# Altium PCB PCB1.PcbDoc
Units mm, origin at the board's own origin, x right, y up, seen from the top; angles counter-clockwise.
Board outline 104.33 x 88.77 mm, 4 copper layers (Top Layer, GND, Signal #1, Signal #2), stack 1.582 mm thick; 59 components, 38 nets, 255 pads, 88 vias.
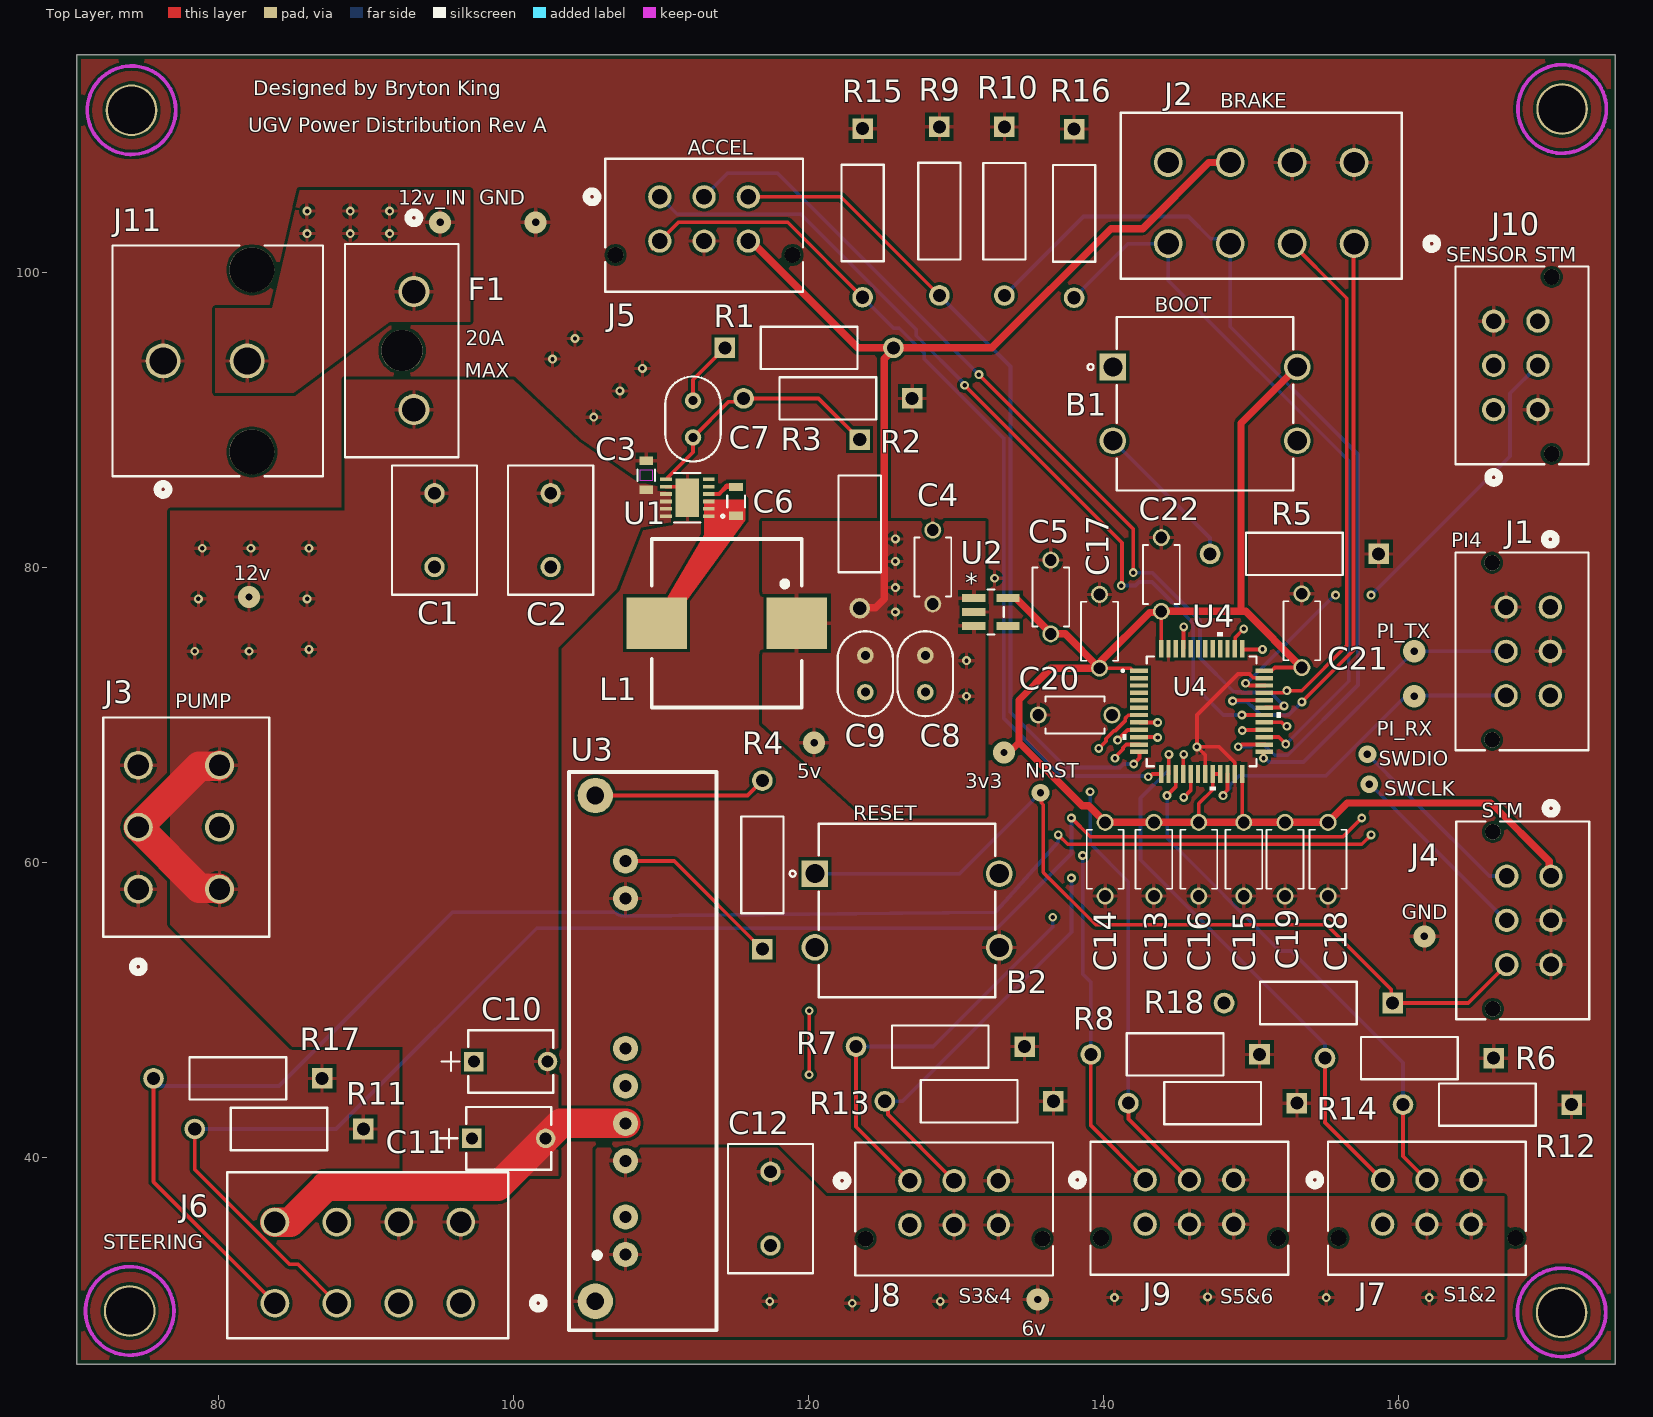
[diagram p0: Top Layer view]
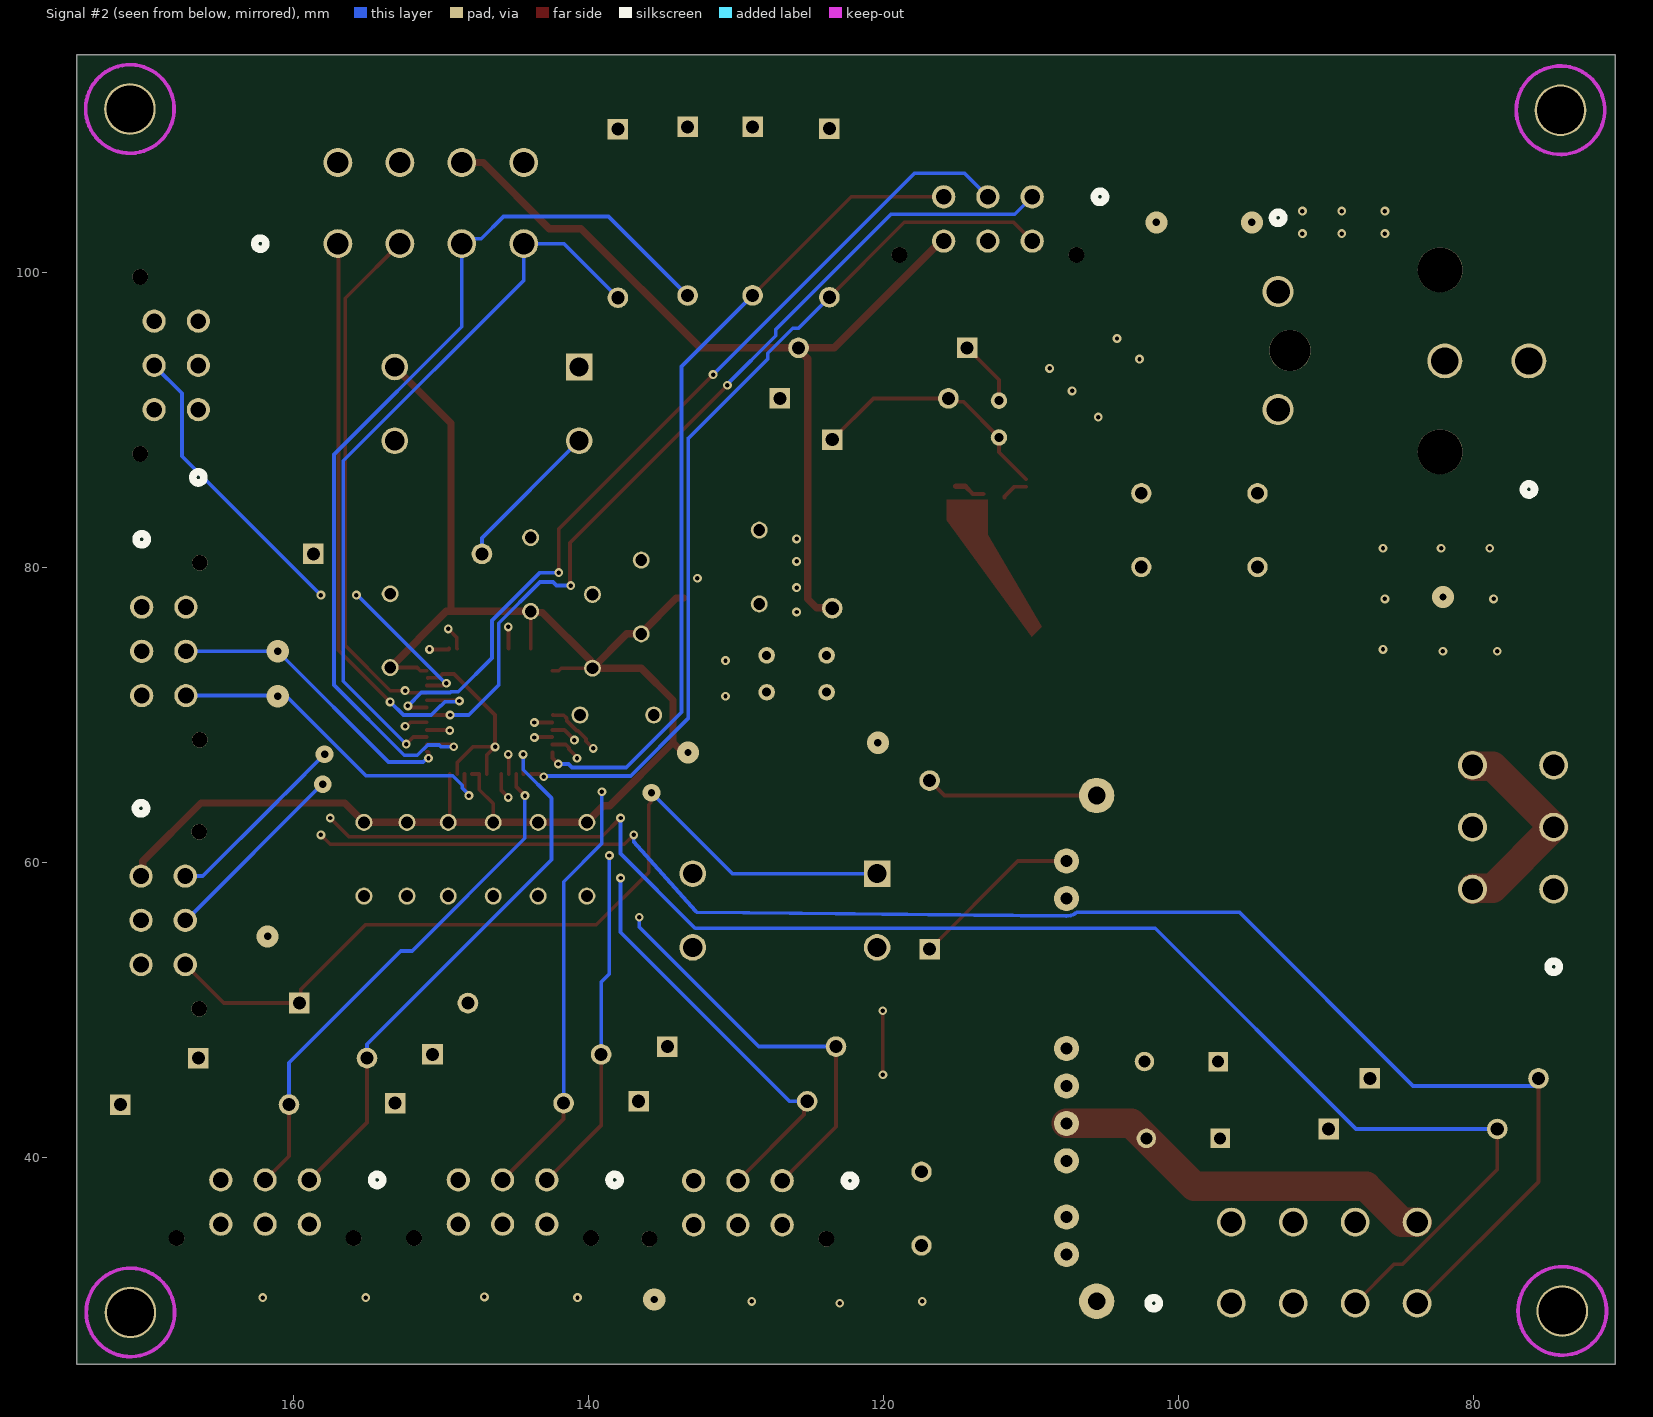
[diagram p1: Signal #2 view, seen from below]
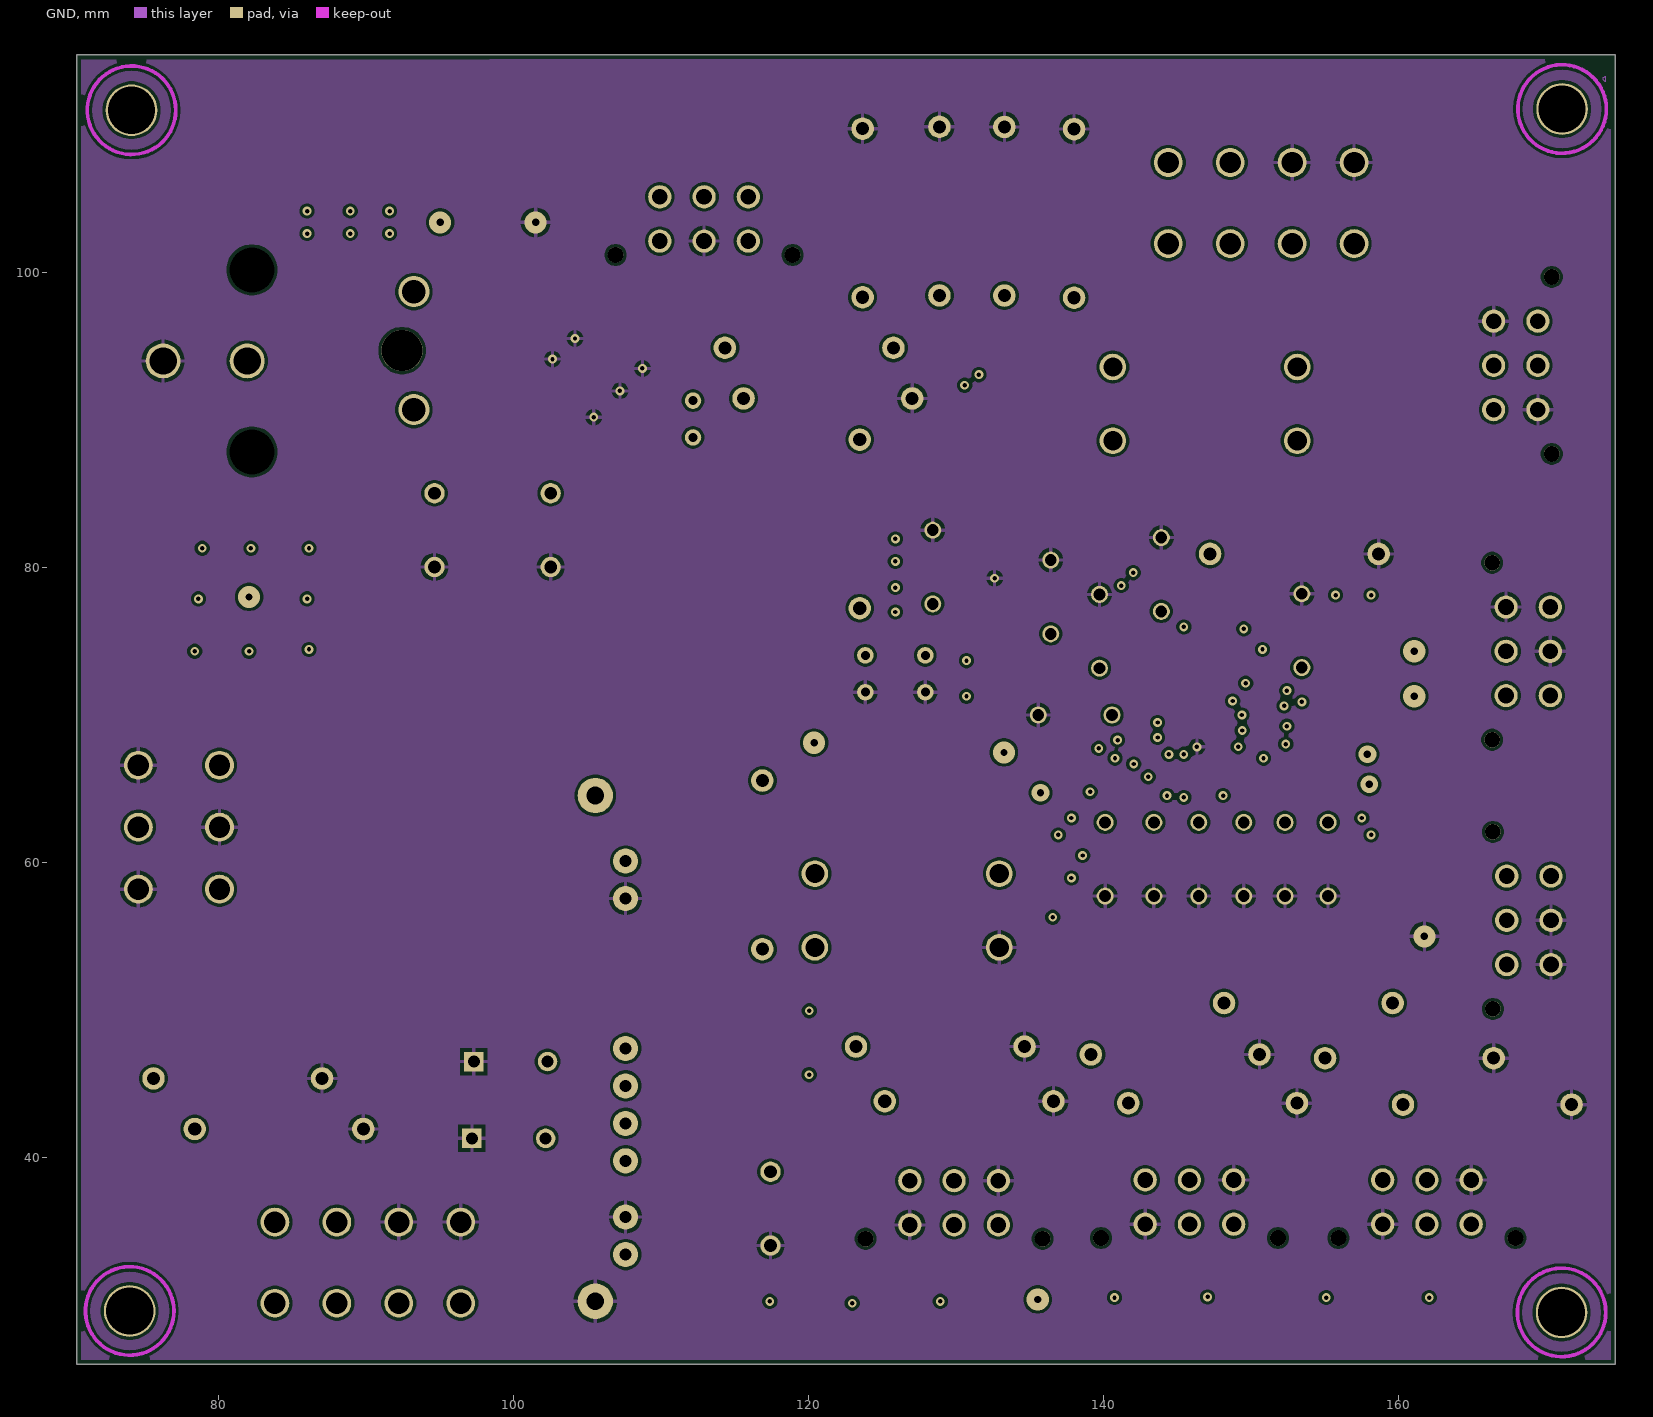
[diagram p2: GND]
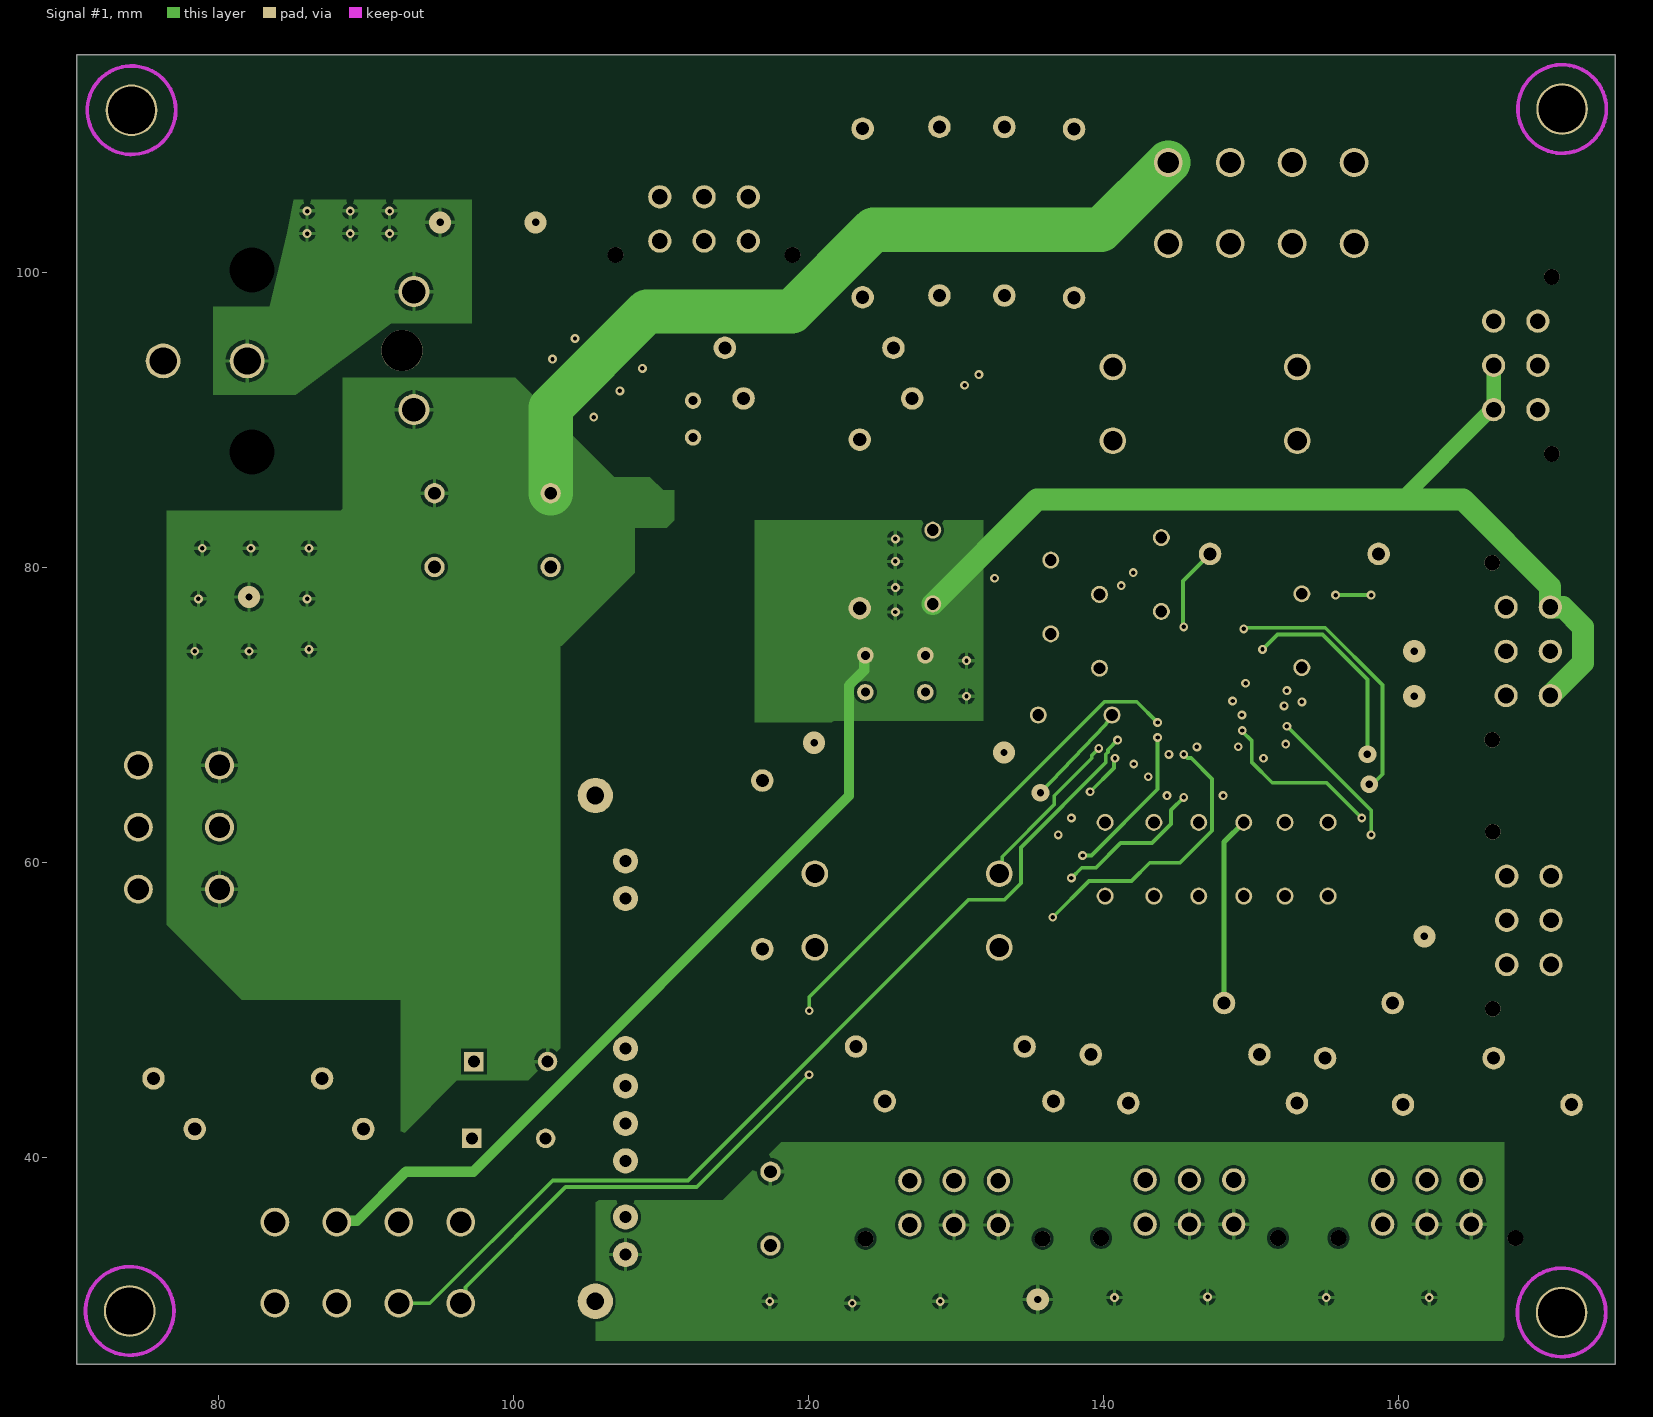
[diagram p3: Signal #1]
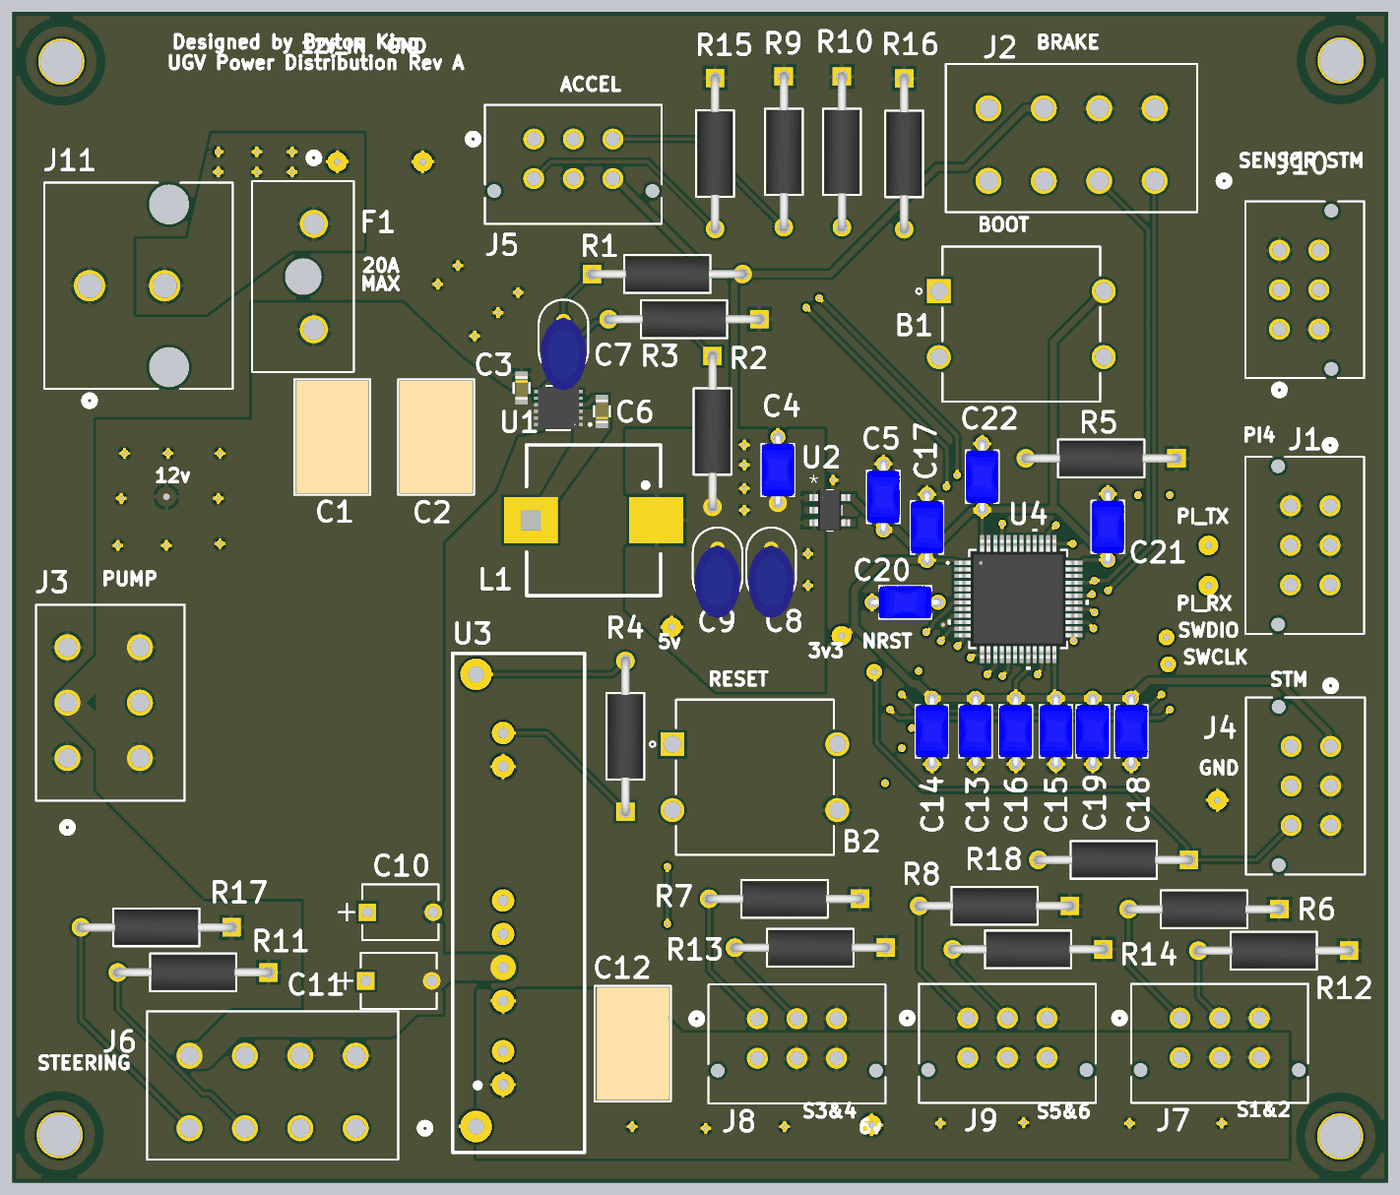
[diagram p4: 3D render of the assembled board from above, using the file's embedded part models]

## Layer stack, top to bottom
Top Solder: solder mask 0.0102, Solder Resist, Dk 3.5
Top Layer: signal copper 0.07
Dielectric 2: prepreg 0.1778, PP-006, Dk 4.1
GND: signal copper 0.035
Dielectric 1: dielectric 1.016, FR-4, Dk 4.8
Signal #1: signal copper 0.035
Dielectric 3: prepreg 0.1778, PP-006, Dk 4.1
Signal #2: signal copper 0.07
Bottom Solder: solder mask 0.0102, Solder Resist, Dk 3.5

## Board outline
70.35,25.975 70.35,114.75 174.675,114.75 174.675,25.975

## Design rules (kind name [scope] priority, off if disabled: settings)
BoardOutlineClearance [All] p1: gap=0.3 ignorepadtopadclearanceinfootprint=FALSE
Clearance [All] p1: gap=0.2 ignorepadtopadclearanceinfootprint=TRUE
HoleSize [All] p1: absolutevalues=TRUE maxlimit=4 minlimit=0.025 maxpercent=80.000 minpercent=20.000
MinimumAnnularRing [All] p1: minimumring=0.15
MinimumSolderMaskSliver [All] p1: minsoldermaskwidth=0.19
PolygonConnect PolygonConnect_5v [InNet('5v')] p1: thpad.connectstyle=Direct thpad.reliefconductorwidth=0.254 thpad.reliefentries=4 thpad.polygonreliefangle="90 Angle" thpad.airgapwidth=0.254 smdpad.connectstyle=Relief smdpad.reliefconductorwidth=0.254 smdpad.reliefentries=4 smdpad.polygonreliefangle="90 Angle" smdpad.airgapwidth=0.254 via.connectstyle=Relief via.reliefconductorwidth=0.254 via.reliefentries=4 via.polygonreliefangle="90 Angle" via.airgapwidth=0.254
PolygonConnect PolygonConnect_12V [HasFootprint('LMR51450FSQDRRRQ1') vs InNet('12v')] p2: thpad.connectstyle=Relief thpad.reliefconductorwidth=0.254 thpad.reliefentries=4 thpad.polygonreliefangle="90 Angle" thpad.airgapwidth=0.254 smdpad.connectstyle=Direct smdpad.reliefconductorwidth=0.254 smdpad.reliefentries=4 smdpad.polygonreliefangle="90 Angle" smdpad.airgapwidth=0.254 via.connectstyle=Relief via.reliefconductorwidth=0.254 via.reliefentries=4 via.polygonreliefangle="90 Angle" via.airgapwidth=0.254
PolygonConnect PolygonConnect_12V_c3 [HasFootprint('.1U') vs InNet('12v')] p3: thpad.connectstyle=Relief thpad.reliefconductorwidth=0.254 thpad.reliefentries=4 thpad.polygonreliefangle="90 Angle" thpad.airgapwidth=0.254 smdpad.connectstyle=Direct smdpad.reliefconductorwidth=0.254 smdpad.reliefentries=4 smdpad.polygonreliefangle="90 Angle" smdpad.airgapwidth=0.254 via.connectstyle=Relief via.reliefconductorwidth=0.254 via.reliefentries=4 via.polygonreliefangle="90 Angle" via.airgapwidth=0.254
PolygonConnect [All] p4: connectstyle=Relief reliefconductorwidth=0.254 reliefentries=4 polygonreliefangle="90 Angle" airgapwidth=0.254
RoutingVias [All] p1: holewidth=0.5 width=0.6 viastyle="Through Hole" minholewidth=0.25 minwidth=0.5 maxholewidth=0.3 maxwidth=1
SolderMaskExpansion [All] p1: expansion=0.102 istentingtop=FALSE
SupplyNets "Schematic Supply Nets" [InNet('GND')] p1: voltage=0.000
Width [All] p1: maxlimit=10 minlimit=0.254 preferedwidth=0.254 minimp=50.000000 maximp=50.000000 favimp=50.000000
28 further rules are at their usual default settings.

## Classes and differential pairs
component class PowerRegulation: C1 C2 C3 C4 C5 C6 C7 C8 C9 C10 C11 C12 L1 R1 R2 R3 R4 U1 U2 U3
component class MCU: B1 B2 C13 C14 C15 C16 C17 C18 C19 C20 C21 C22 R5 R6 R7 R8 R9 R10 R11 R12 R13 R14 R15 R16 R17 R18 U4
component class Connectors: F1 J1 J2 J3 J4 J5 J6 J7 J8 J9 J10 J11

## Components (designator, comment, footprint, x,y, rotation, side; value= is the part's Value field where it differs from the comment)
B1 "Button" Button 146.7,90.65 r0 top
B2 "Button" Button 126.5,56.3 r0 top
C1 "Capacitor" 4.7u 94.742,82.55 r90 top value=4.7u
C2 "Capacitor" 4.7u 102.616,82.55 r90 top value=4.7u
C3 "Capacitor" .1U#1 108.966,86.233 r270 top value=100n
C4 "Capacitor" 1U 128.27,80.264 r270 top value=1u
C5 "Capacitor" 1U 136.271,78.232 r270 top value=1u
C6 "Capacitor" .1U#2 115.062,84.455 r90 top value=100n
C7 "Capacitor" Cap33u 111.76,90.043 r270 top value=33p
C8 "Capacitor" Cap33u 127.508,72.771 r270 top value=33u
C9 "Capacitor" Cap33u 123.444,72.771 r270 top value=33u
C10 "Capacitor" 22u 99.568,46.228 r0 top value=22u
C11 "Capacitor" 22u 99.441,41.021 r0 top value=22u
C12 "Capacitor" 4.7u 117.523,36.551 r90 top value=220u
C13 "Capacitor" 1U 143.256,60.452 r270 top value=1u
C14 "Capacitor" 1U 139.954,60.452 r270 top value=.1u
C15 "Capacitor" 1U 149.352,60.452 r270 top value=1u
C16 "Capacitor" 1U 146.304,60.452 r270 top value=10n
C17 "Capacitor" 1U 139.827,75.398 r90 top value=.1u
C18 "Capacitor" 1U 155.067,60.452 r270 top value=10u
C19 "Capacitor" 1U 152.146,60.452 r270 top value=.1u
C20 "Capacitor" 1U 138.303,70.104 r180 top value=100n
C21 "Capacitor" 1U 153.543,75.438 r90 top value=.1u
C22 "Capacitor" 1U 144.018,79.248 r90 top value=.1u
F1 "FUSE_178.6764.0001_LTF" fuse_holder 92.329,94.742 r270 top
J1 "6_pin_header" 6pinHeader1 168.735,74.12 r90 top
J2 "8_pin_header" 8pinHeader 149.975,104.6 r180 top
J3 "6_pin_header" 6pinHeader2 77.343,62.611 r90 top
J4 "6_pin_header" 6pinHeader1 168.783,55.88 r90 top
J5 "6_pin_header" 6pinHeader1 113.067,103.582 r180 top
J6 "8_pin_header" 8pinHeader 89.408,32.766 r180 top
J7 "6_pin_header" 6pinHeader1 162.069,36.932 r180 top
J8 "6_pin_header" 6pinHeader1 130.017,36.884 r180 top
J9 "6_pin_header" 6pinHeader1 145.971,36.932 r180 top
J10 "6_pin_header" 6pinHeader1 167.942,93.853 r270 top
J11 "2POS HEADER" "CONN HEADER VERT 2POS" 78.755,94.234 r270 top
L1 "Inductor" 4.7uIND 114.427,76.2 r270 top value=4.7u
R1 "Resistor" resistor 120.396,94.869 r0 top value=1k
R2 "Resistor" resistor 123.444,82.55 r270 top value=100k
R3 "Resistor" resistor 120.904,91.44 r180 top value=19.1k
R4 "Resistor" resistor 116.84,60.198 r90 top value=220
R5 "Resistor" resistor 152.527,80.899 r180 top value=10K
R6 "Resistor" resistor 160.322,46.711 r180 top value=10K
R7 "Resistor" resistor 128.524,47.498 r180 top value=10K
R8 "Resistor" resistor 144.447,46.965 r180 top value=10K
R9 "Resistor" resistor 128.846,103.757 r270 top value=10K
R10 "Resistor" resistor 133.25,103.75 r270 top value=10K
R11 "Resistor" resistor 83.693,41.91 r180 top value=10K
R12 "Resistor" resistor 165.608,43.561 r180 top value=10K
R13 "Resistor" resistor 130.477,43.79 r180 top value=10K
R14 "Resistor" resistor 146.987,43.663 r180 top value=10K
R15 "Resistor" resistor 123.639,103.63 r270 top value=10K
R16 "Resistor" resistor 137.975,103.6 r270 top value=10K
R17 "Resistor" resistor 80.899,45.339 r180 top value=10K
R18 "Resistor" resistor 153.475,50.45 r180 top value=10K
U1 "LMR51450FSQDRRRQ1" LMR51450FSQDRRRQ1 111.76,84.836 r180 top
U2 "TLV70033DDCR" TLV70033DDCR 131.953,76.962 r0 top
U3 "NSR020A0X43Z" NSR020A0X43Z 105.519,65.991 r270 top
U4 "STM32G474CBT6TR" STM32G474CBT6TR 146.626,70.354 r0 top

## Footprints (in the part's own frame and the unit in brackets; to place one, negate y for a bottom-side part, rotate by r counter-clockwise, add the part's x,y. Pads: shape width x height; smd on the part's side, far side on the other; paste and mask are expansions set on the pad)
1U [mm]
  round 1.15 hole 0.8: 1(-2.246,0.127) 2(2.754,0.127)
  silkscreen extent -1.75,-1.12 2.25,1.38, body extent -2.5,-1.12 3,1.38, height 5.5
4.7u [mil]
  round 54 hole 34 paste-99999 mask+0: 1(-100,5) 2(96.85,5)
  silkscreen extent -174,-109 171,119, body extent -169,-104 166,114, height 433
4.7uIND [mm]
  rect 3.5x4.1 smd paste-2539.97 mask+0: 1(0,4.75) 2(0,-4.75)
  silkscreen extent -5.72,-5.08 5.72,5.08
6pinHeader1 [mil]
  round 62 hole 42 paste-99999 mask+0: 1(125,-60) 2(6.89,-60) 3(-111.22,-60) 4(125,58.11) 5(6.89,58.11) 6(-111.22,58.11)
  round 42 hole 42 unplated paste-99999 mask+0: 7(-229.33,95.12) 8(243.11,95.12)
  silkscreen extent -257,-162 321,193
6pinHeader2 [mil]
  round 77 hole 57 paste-99999 mask+0: 1(-174.79,110.48) 2(-9.44,110.48) 3(155.92,110.48) 4(-174.79,-106.06) 5(-9.44,-106.06) 6(155.92,-106.06)
  silkscreen extent -397,-239 283,204
8pinHeader [mil]
  round 77 / inner round 77.01 / far side round 77 hole 57 paste-99999 mask+0: 1(-275,105) 2(-109.65,105) 3(55.71,105) 4(221.06,105) 5(-275,-111.54) 6(-109.65,-111.54) 7(55.71,-111.54) 8(221.06,-111.54)
  silkscreen extent -497,-244 348,199
22u [mil]
  rect 52x52 hole 32 paste-99999 mask+0: 1(-90,10)
  round 52 hole 32 paste-99999 mask+0: 2(106.85,10)
  silkscreen extent -176,-74 122,94
.1U#1 [mil]
  rect 22x37 smd paste+0 mask+0: 1(-38.5,0) 2(38.5,0)
  Top Layer keep-out region: -15,-16.5 -15,16.5 15,16.5 15,-16.5
  silkscreen extent -15,-24 15,24, body extent -36,-19 36,19, height 37
.1U#2 [mil]
  rect 22x37 smd paste+0 mask+0: 1(-38.5,0) 2(38.5,0)
  silkscreen extent -15,-24 15,24, body extent -36,-19 36,19, height 37
Button [mil]
  rect 71x71 / inner round 70.98 / far side rect 71x71 hole 51 paste-99999 mask+0: 1(-240,115)
  round 71 / inner round 70.98 / far side round 71 hole 51 paste-99999 mask+0: 2(252.13,115) 3(-240,-81.85) 4(252.13,-81.85)
  silkscreen extent -307,-215 242,248
Cap33u [mil]
  round 44 hole 24 paste-99999 mask+0: 1(-49.21,15) 2(49.21,15)
  silkscreen extent -113,-59 114,89, body extent -59,-54 158,84, height 236
"CONN HEADER VERT 2POS" [mil]
  round 93 / inner round 92.99 / far side round 93 hole 73 paste-99999 mask+0: 1(10,-100) 2(10,124.41)
  round 120 / inner round 60 / far side round 120 hole 120 unplated paste-99999 mask+0: 3(-232.91,137.2) 4(252.91,137.2)
  silkscreen extent -298,-235 368,327
fuse_holder [mil]
  round 83 hole 63 paste-99999 mask+0: 1(-155,35) 2(159.96,35)
  round 110 hole 110 unplated paste-99999 mask+0: 3(2.48,3.5)
  silkscreen extent -367,-149 287,154
LMR51450FSQDRRRQ1 [mil]
  rect 31.81x10.03 smd paste+0 mask+0: 1(-56.91,54.22) 2(-56.91,34.53) 3(-56.91,14.84) 4(-56.91,-4.84) 5(-56.91,-24.53) 6(-56.91,-44.22) 7(56.91,-44.22) 8(56.91,-24.53) 9(56.91,-4.84) 10(56.91,14.84) 11(56.91,34.53) 12(56.91,54.22)
  rect 63x102 smd paste+0 mask+0: 13(0,5)
  silkscreen extent -99,-61 35,71, body extent -61,-56 61,66, height 32
NSR020A0X43Z [mm]
  round 1.7 hole 0.8: 1(32.59,2.05) 2(5.92,2.05) 3(8.46,2.05) 4(18.62,2.05) 5(21.16,2.05) 6(23.7,2.05) 7(26.24,2.05) 8(30.05,2.05)
  round 2.4 hole 1.2: 9(1.47,0) 10(35.76,0)
  silkscreen extent -0.13,-1.78 37.72,8.22
resistor [mil]
  rect 55x55 / inner round 60 / far side rect 55x55 hole 35 paste-99999 mask+0: 1(-240,0)
  round 55 / inner round 60 / far side round 55 hole 35 paste-99999 mask+0: 2(210,0)
  silkscreen extent -144,-56 114,56, body extent -252,-51 222,51, height 103
STM32G474CBT6TR [mil]
  rect 47x12 smd paste+0 mask+0: 1(-167.32,103.27) 2(-167.32,83.58) 3(-167.32,63.9) 4(-167.32,44.21) 5(-167.32,24.53) 6(-167.32,4.84) 7(-167.32,-14.84) 8(-167.32,-34.53) 9(-167.32,-54.21) 10(-167.32,-73.9) 11(-167.32,-93.58) 12(-167.32,-113.27) 25(167.32,-113.27) 26(167.32,-93.58) 27(167.32,-73.9) 28(167.32,-54.21) 29(167.32,-34.53) 30(167.32,-14.84) 31(167.32,4.84) 32(167.32,24.53) 33(167.32,44.21) 34(167.32,63.9) 35(167.32,83.58) 36(167.32,103.27)
  rect 12x47 smd paste+0 mask+0: 13(-108.27,-172.32) 14(-88.58,-172.32) 15(-68.9,-172.32) 16(-49.21,-172.32) 17(-29.53,-172.32) 18(-9.84,-172.32) 19(9.84,-172.32) 20(29.53,-172.32) 21(49.21,-172.32) 22(68.9,-172.32) 23(88.58,-172.32) 24(108.27,-172.32) 37(108.27,162.32) 38(88.58,162.32) 39(68.9,162.32) 40(49.21,162.32) 41(29.53,162.32) 42(9.84,162.32) 43(-9.84,162.32) 44(-29.53,162.32) 45(-49.21,162.32) 46(-68.9,162.32) 47(-88.58,162.32) 48(-108.27,162.32)
  silkscreen extent -214,-216 211,206, body extent -177,-182 177,172, height 63
TLV70033DDCR [mil]
  rect 62x22 smd paste-31 mask-31: 1(-31,37.4) 2(-31,0) 3(-31,-37.4) 4(61,-37.4) 5(61,37.4)
  silkscreen extent 6,-60 50,60, body extent -45,-60 75,60, height 43

## Part data
C13: "U4 VREF decoupling 2", SimulationGenericComponent=True
C14: "U4 VREF decoupling 1", SimulationGenericComponent=True
C15: "U4 VDDA decoupling 2", SimulationGenericComponent=True
C16: "U4 VDDA decoupling 1", SimulationGenericComponent=True
C17: "U4 VBAT decoupling", SimulationGenericComponent=True
C18: "Local 3.3 V bulk capacitor", SimulationGenericComponent=True
C19: "U4 VDD pin 24 decoupling", SimulationGenericComponent=True
C21: "U4 VDD pin 36 decoupling", SimulationGenericComponent=True
C22: "U4 VDD pin 48 decoupling", SimulationGenericComponent=True
J1: "Pi"
J2: "Brake Motor"
J3: "Solenoid/Pump/Modem"
J4: "Onboard Stm"
J5: "Accel Motor"
J6: "Steering Motor"
J7: "Servo1&2"
J8: "Servo3&4"
J9: "Servo5&6"
J10: "OffboardSTM & SolenoidGPIO"
J11: library part "CONN HEADER VERT 2POS", "12V INPUT"
C1 C2 C3 C4 C5 C6 C7 C8 C9 C10 C11 C12 C20 L1: SimulationGenericComponent=True
R1 R2 R3 R4 R5 R6 R7 R8 R9 R10 R11 R12 R13 R14 R15 R16 R17 R18: SimulationGenericComponent=True, TC1=0, TC2=0

## Free pads (board coordinates)
  round 3.5 hole 3.2 unplated paste-2539.97: 3(73.95,29.575) 3(74.077,110.977) 3(171.025,29.475) 3(171.061,111.062)

## Via types
v1: diameter 0.6, hole 0.3, Top Layer to Signal #2, 75 vias
v2: diameter 1.5, hole 0.5, Top Layer to Signal #2, 8 vias
v3: diameter 1.2, hole 0.5, Top Layer to Signal #2, 3 vias
v4: diameter 0.6, hole 0.3, Top Layer to Signal #2, tented top, 1 vias
v5: diameter 1.5, hole 0.5, Top Layer to Signal #2, tented top, 1 vias

## Nets (pads, with @x,y where several pads share a name; then routed paths per layer and width w, separated by ;. In a path a pad name is that pad's centre, name@x,y a point inside that pad or via, vN(x,y) a via of type N, cw(c..) or ccw(c..) an arc to the next point about the centre after c; other vN are vias at no path point)
3v3: B1.2 C5.2 C13.1 C14.1 C15.1 C16.1 C17.1 C18.1 C19.1 C21.1 C22.1 J4.1 R18.2 U2.5 U4.1 U4.20 U4.21 U4.24 U4.36 U4.48 | length 122.9
  Top Layer w0.254: C17.1 141.82,73.152 141.991,72.981 U4.1@142.435,72.981 ; U4.48@143.881,74.482 C22.1@143.881,76.708 ; C16.1 146.431,63.968 147.376,64.913 U4.20 ; U4.20@147.435,65.981 U4.21@147.876,65.981 ; U4.24 149.376,62.801 C15.1 ; U4.36@150.935,72.981 151.379,72.981 151.59,73.192 C21.1
  Top Layer w0.5: v2(133.223,67.437) 133.56,67.437 134.239,68.116 ; U2.5 134.01,77.912 136.398,75.524 C5.2 137.374,75.478 C17.1 ; C22.1 143.815,76.926 143.093,76.926 139.824,73.657 139.824,73.276 C17.1 ; C22.1@144.191,77.002 149.294,77.002 ; B1.2 149.294,89.761 149.294,77.002 ; C21.1 149.606,77.002 149.294,77.002 ; J4.1 170.179,59.183 170.179,60.072 166.243,64.008 156.504,64.008 C18.1 C19.1 C15.1 C16.1 C13.1 C14.1 138.964,63.815 138.539,63.815 134.239,68.116 ; 134.239,68.116 134.239,70.993 136.398,73.152 C17.1
  Signal #1 w0.35: R18.2 148.141,61.36 C15.1
5v: C4.2 C8.1 C9.1 J1.1 J1.3 J2.7 J5.6 J6.7 J10.1 J10.2 L1.1 R1.2 R2.2 U2.1 U2.3 | length 185.8
  Top Layer w0.254: J1.1 J1.1@170.259,77.648
  Top Layer w0.5: J5.6@115.984,102.198 123.313,94.869 R1.2 ; R2.2 123.488,77.26 124.509,77.26 125.095,77.846 125.095,94.128 125.73,94.763 R1.2 ; J2.7 147.108,107.433 142.626,102.951 140.48,102.951 132.398,94.869 R1.2
  Signal #1 w0.7: J6.7 88.092,35.698 89.362,35.698 92.68,39.015 97.233,39.015 122.716,64.498 122.716,71.98 123.745,73.009 123.745,73.941 C9.1
  Signal #1 w1: 160.147,84.582 165.956,90.391 165.975,90.391 J10.1@166.418,90.834 ; J10.1 J10.1@166.418,90.834 ; J10.2 J10.1@166.418,90.834
  Signal #1 w1.5: C4.2 135.469,84.582 160.147,84.582 164.338,84.582 170.245,78.675 170.245,77.309 J1.1 170.273,77.281 171.131,77.281 172.466,75.946 172.466,73.502 J1.3
  other v1: 130.683,71.247 130.683,73.66 125.857,76.962 125.857,78.613 125.857,80.391 125.857,81.915
  other v2: 120.35,68.1
6v: C12.2 J7.5 J7.6 J8.5 J8.6 J9.5 J9.6 U3.1 U3.7
  other v1: 122.936,30.099 117.348,30.226 128.905,30.226 140.716,30.48 155.067,30.48 162.052,30.48 147.025,30.525
  other v2: 135.509,30.353
12v: C1.2 C2.2 C3.2 C10.2 C11.2 F1.2 J2.8 J3.2 J3.4 J3.6 J6.8 U1.9 U1.10 U1.11 U1.12 U3.6 | length 95.6
  Top Layer w2: J3.4 79.978,58.23 78.678,58.23 J3.2 78.678,66.512 79.978,66.512 J3.6 ; J6.8 84.837,35.599 87.256,38.019 98.899,38.019 103.171,42.291 U3.6
  Signal #1 w3: C2.2 102.489,90.805 109.015,97.331 118.831,97.331 124.37,102.87 139.797,102.87 J2.8
  other v1: 78.359,74.295 82.042,74.295 86.106,74.422 78.613,77.851 85.979,77.851 78.867,81.28 82.169,81.28 86.106,81.28
  other v5: 82.042,77.978
ACC_EN1: J5.3 R9.2 U4.12 | length 57.1
  Top Layer w0.254: J5.3 122.163,105.106 R9.2@128.936,98.333 ; v1(142.017,66.656) 142.017,66.673 142.41,67.065 U4.12@142.41,67.456
  Signal #2 w0.254: R9.2 133.669,93.6 133.669,70.166 137.412,66.423 141.09,66.423 141.323,66.656 v1(142.017,66.656)
ACC_EN2: J5.4 R15.2 U4.13 | length 62.7
  Top Layer w0.254: J5.4@109.374,101.588 J5.4 111.164,103.378 118.559,103.378 R15.2@123.958,97.98 ; v1(143.002,65.786) 143.096,65.786 143.291,65.981 U4.13@143.876,65.981
  Signal #2 w0.254: R15.2 125.735,96.2 126.125,96.2 127.817,94.508 127.817,94.118 133.141,88.794 133.215,88.72 133.215,69.731 137.112,65.834 142.954,65.834 v1(143.002,65.786)
ACC_PWM1: J5.1 U4.30 | length 60.3
  Top Layer w0.254: v1(130.556,92.329) 141.224,81.661 141.224,78.799 v1(141.175,78.75) ; v1(149.35,69.975) 149.351,69.976 150.93,69.976 U4.30@150.933,69.979
  Signal #2 w0.254: J5.1 111.073,103.925 119.46,103.925 127.277,96.108 127.277,95.69 130.556,92.411 v1(130.556,92.329) ; v1(141.175,78.75) 142.139,78.75 142.383,78.994 143.254,78.994 146.05,76.198 146.05,72.009 148.084,69.975 v1(149.35,69.975)
ACC_PWM2: J5.2 U4.31 | length 59.5
  Top Layer w0.254: v1(131.525,93.05) 141.986,82.589 v1(141.986,79.629) ; U4.31@150.935,70.481 152.005,70.481 152.12,70.596 v1(152.214,70.596)
  Signal #2 w0.254: J5.2 114.486,106.7 117.875,106.7 v1(131.525,93.05) ; v1(141.986,79.629) 143.261,79.629 146.504,76.386 146.504,73.848 148.8,71.552 149.295,71.552 149.346,71.501 151.309,71.501 v1(152.214,70.596)
BRA_EN1: J2.3 R10.2 U4.26 | length 64.1
  Top Layer w0.254: v1(149.1,67.825) 149.194,67.825 149.346,67.977 150.931,67.977 U4.26@150.935,67.981
  Signal #2 w0.254: R10.2 138.609,103.775 145.725,103.775 147.241,102.259 148.234,102.259 J2.3 148.56,96.296 157.226,87.63 157.226,72.014 152.457,67.245 151.573,67.245 150.869,67.95 150.094,67.95 149.969,67.825 v1(149.1,67.825)
BRA_EN2: J2.4 R16.2 U4.27 | length 50.3
  Top Layer w0.254: U4.27@150.935,68.481 151.854,68.481 152.325,68.01 v1(152.325,68)
  Signal #2 w0.254: R16.2 141.642,101.933 J2.4 144.36,99.44 156.591,87.209 156.591,72.266 v1(152.325,68)
BRA_PWM1: J2.1 U4.32 | length 40.2
  Top Layer w0.254: v1(148.725,70.925) 148.781,70.981 U4.32@150.935,70.981 ; v1@153.416,70.993 153.43,70.979 153.529,70.979 156.918,74.368 J2.1@156.918,101.975
  Signal #2 w0.254: v1(148.725,70.925) 148.776,70.874 149.7,70.874 149.97,70.604 149.995,70.604 150.63,69.969 152.519,69.969 v1(153.416,70.866)
BRA_PWM2: J2.2 U4.33 | length 36.3
  Top Layer w0.254: U4.33@150.935,71.481 152.159,71.481 152.306,71.628 153.409,71.628 156.464,74.683 156.464,98.229 J2.2@152.316,102.377
  other v1: 152.4,71.628
BUCK_FB: C7.2 R2.1 R3.2 U1.7 | length 17.1
  Top Layer w0.254: U1.7 112.141,87.786 C7.2 114.569,91.221 115.351,91.221 R3.2 120.65,91.44 R2.1
GND: B2.4 C1.1 C2.1 C3.1 C4.1 C5.1 C8.2 C9.2 C10.1 C11.1 C12.1 C13.2 C14.2 C15.2 C16.2 C17.2 C18.2 C19.2 C20.2 C21.2 C22.2 J1.2 J1.4 J2.5 J2.6 J3.1 J3.3 J3.5 J4.2 J4.3 J5.5 J6.5 J6.6 J7.3 J7.4 J8.3 J8.4 J9.3 J9.4 J10.3 J10.4 J11.1 R3.1 R5.1 R6.1 R7.1 R8.1 R9.1 R10.1 R11.1 R12.1 R13.1 R14.1 R15.1 R16.1 R17.1 U1.8 U1.13 U2.2 U3.3 U3.8 U3.10 U4.19 U4.23 U4.35 U4.47 | length 15.7
  Top Layer w0.254: U1.8 111.087,85.459 111.76,84.786 U1.13 ; U4.19 146.876,67.246 v1(146.304,67.818) ; U4.23 148.873,65.98 148.873,66.754 147.81,67.818 v1(146.304,67.818) ; U4.35 150.855,72.498 150.177,72.498 150.175,72.5 150.121,72.5 149.866,72.755 149.082,72.755 146.304,69.977 v1(146.304,67.818)
  other v1: 132.588,79.248 105.41,90.17 107.188,91.948 108.712,93.472 102.616,94.107 104.14,95.504
  other v2: 161.723,54.973 101.473,103.378
NetB1_3: B1.3 R5.2 U4.45 | length 17.6
  Top Layer w0.254: U4.45 145.394,74.495 145.394,75.925 v1(145.415,75.946)
  Signal #1 w0.254: v1(145.415,75.946) 145.353,76.008 145.353,79.059 R5.2
  Signal #2 w0.254: B1.3 147.193,81.982 R5.2
NetB2_2: B2.2 U4.7 | length 15.4
  Top Layer w0.254: v1(139.644,67.714) 140.132,68.203 140.132,68.369 140.665,68.902 140.75,68.902 141.451,69.603 141.451,69.764 141.644,69.956 142.355,69.956 U4.7
  Signal #1 w0.254: B2.2@132.279,59.221 133.1,60.042 133.1,60.373 136.628,63.901 136.628,64.503 139.17,67.045 139.17,67.225 139.644,67.699 v1(139.644,67.714)
NetC6_1: C6.1 L1.2 U1.1 U1.2 U1.3
NetC6_2: C6.2 U1.4 | length 2.1
  Top Layer w0.3: U1.4 113.91,84.959 114.434,85.484
  Top Layer w0.4: 114.434,85.484 C6.2@115.062,85.484
NetC7_1: C7.1 R1.1 | length 4.5
  Top Layer w0.254: C7.1 112.141,92.71 R1.1
NetF1_1: F1.1 J11.2
  other v1: 85.979,102.616 88.9,102.616 91.567,102.616 85.979,104.14 88.9,104.14 91.567,104.14
  other v2: 94.996,103.378
NetR4_1: R4.1 U3.2 | length 11.7
  Top Layer w0.254: U3.2 110.871,60.071 R4.1
NetR4_2: R4.2 U3.9 | length 11.7
  Top Layer w0.254: U3.9 115.829,64.521 R4.2
NRST: B2.1 C20.1 J4.6 R18.1 | length 67.4
  Top Layer w0.254: v3(135.701,64.705) 135.763,64.643 135.763,64.024 135.89,63.897 135.89,59.309 139.446,55.753 155.097,55.753 159.469,51.381 159.469,50.598 R18.1@159.571,50.496 ; C20.1 C20.1@140.551,69.979 ; R18.1 164.702,50.45 J4.6
  Signal #1 w0.254: v3(135.701,64.705) 140.101,69.31 C20.1
  Signal #2 w0.254: B2.1@119.779,59.221 130.216,59.221 v3(135.701,64.705)
PI_RX: J1.6 U4.22 | length 23.7
  Top Layer w0.254: v1(148.082,64.516) 148.082,64.61 148.376,64.904 U4.22
  Signal #2 w0.254: v1(148.082,64.516) 148.082,64.59 148.526,65.035 148.526,65.214 149.176,65.864 155.058,65.864 160.49,71.295 J1.6
  other v2: 161.036,71.247
PI_TX: J1.5 U4.25 | length 20.2
  Top Layer w0.254: v1(150.819,67.048) 150.819,67.456 150.844,67.481 U4.25@150.935,67.481
  Signal #2 w0.254: v1(150.819,67.048) 150.913,67.048 151.169,66.791 153.532,66.791 v2(161.036,74.295) J1.5
SER_PWM1: J7.1 R6.2 U4.14 | length 38
  Top Layer w0.254: U4.14 144.397,65.998 144.397,66.697 144.399,66.699 v1(144.399,67.31) ; R6.2 154.988,42.345 J7.1@159.052,38.281
  Signal #2 w0.254: v1(144.399,67.31) 144.399,66.26 142.481,64.342 142.481,60.169 154.988,47.662 R6.2
SER_PWM2: J7.2 R12.2 U4.15 | length 35.9
  Top Layer w0.254: v1(144.272,64.516) 144.876,65.12 U4.15 ; R12.2 160.274,40.059 J7.2@162.052,38.281
  Signal #2 w0.254: v1(144.272,64.516) 144.285,64.503 144.285,61.616 151.919,53.982 152.693,53.982 160.274,46.401 R12.2 R12.2@160.274,43.432
SER_PWM3: J8.1 R7.2 U4.16 | length 48.4
  Top Layer w0.254: R7.2 123.19,42.06 J8.1 ; U4.16 v1@145.376,67.035
  Signal #1 w0.254: v1(136.525,56.261) 138.989,58.725 141.864,58.725 143.1,59.961 145.161,59.961 147.333,62.133 147.333,65.646 145.923,67.056 145.669,67.056 v1(145.415,67.31)
  Signal #2 w0.254: R7.2 128.423,47.498 136.525,55.6 v1(136.525,56.261)
SER_PWM4: J8.2 R13.2 U4.17 | length 40.6
  Top Layer w0.254: R13.2 125.362,43.571 125.362,42.888 J8.2 ; v1(145.415,64.389) 145.876,64.85 U4.17
  Signal #1 w0.254: v1(137.795,58.928) 138.492,59.625 139.462,59.625 141.132,61.294 143.255,61.294 144.553,62.592 144.553,63.527 v1(145.415,64.389)
  Signal #2 w0.254: R13.2 126.34,43.79 137.795,55.245 v1(137.795,58.928)
SER_PWM5: J9.1 R8.2 U4.10 | length 35.7
  Top Layer w0.254: R8.2 139.113,42.139 J9.1 ; U4.10@142.435,68.481 143.609,68.481 v1(143.637,68.453)
  Signal #1 w0.254: v1(138.557,60.452) 139.152,60.452 143.637,64.937 v1(143.637,68.453)
  Signal #2 w0.254: v1(138.557,60.452) 138.557,52.415 139.113,51.859 R8.2 R8.2@138.894,47.183
SER_PWM6: J9.2 R14.2 U4.11 | length 34.2
  Top Layer w0.254: v1(140.75,67.05) 140.75,67.11 141.291,67.651 141.291,67.754 141.518,67.981 U4.11@142.435,67.981 ; R14.2 141.668,43.647 141.668,42.583 J9.2
  Signal #1 w0.254: v1(139.065,64.77) 140.684,66.389 140.684,66.984 v1(140.75,67.05)
  Signal #2 w0.254: v1(139.065,64.77) 139.065,61.26 141.653,58.672 R14.2
SOL_GPIO: J10.5 U4.34 | length 32.6
  Top Layer w0.254: v1(149.606,72.128) 149.7,72.128 149.847,71.981 U4.34@150.935,71.981
  Signal #1 w0.254: v1(155.702,78.105) v1(158.115,78.105)
  Signal #2 w0.254: v1(149.606,72.128) 149.665,72.128 155.643,78.105 v1(155.702,78.105) ; v1(158.115,78.105) 167.532,87.522 167.532,91.792 J10.5
STE_EN1: J6.3 R11.2 U4.28 | length 119.5
  Top Layer w0.254: R11.2 78.359,39.156 84.778,32.737 85.355,32.737 J6.3 ; v1(137.795,62.992) 139.065,61.722 156.21,61.722 v1(157.48,62.992) ; v1(149.375,68.925) 149.406,68.956 150.91,68.956 U4.28@150.935,68.981
  Signal #1 w0.254: v1(149.375,68.925) 149.375,68.862 150.027,68.21 150.027,66.764 151.405,65.387 155.085,65.387 v1(157.48,62.992)
  Signal #2 w0.254: R11.2 87.93,41.91 101.545,55.525 132.741,55.525 137.795,60.579 v1(137.795,62.992)
STE_EN2: J6.4 R17.2 U4.29 | length 120
  Top Layer w0.254: R17.2@75.565,44.831 75.565,38.327 J6.4 ; v1(136.906,61.849) 137.541,61.214 157.48,61.214 v1(158.115,61.849) ; U4.29@150.935,69.481 152.04,69.481 152.306,69.215 v1(152.4,69.215)
  Signal #1 w0.254: v1(152.4,69.215) 158.115,63.5 v1(158.115,61.849)
  Signal #2 w0.254: R17.2@75.565,44.831 84.074,44.831 95.843,56.6 106.849,56.6 ccw(c107.569,57.531) 107.582,56.354 132.634,56.61 132.712,56.689 136.906,61.406 v1(136.906,61.849)
STE_PWM1: J6.1 U4.8 | length 69.5
  Top Layer w0.254: v1(120.015,45.593) 120.02,45.598 120.02,49.92 v1(120.025,49.925) ; U4.8@142.435,69.481 142.447,69.469 v1(143.637,69.469)
  Signal #1 w0.254: J6.1 96.719,30.425 96.719,31.187 103.505,37.973 112.395,37.973 v1(120.015,45.593) ; v1(120.025,49.925) 120.025,50.864 140.04,70.879 142.227,70.879 v1(143.637,69.469)
STE_PWM2: J6.2 U4.9 | length 68.2
  Top Layer w0.254: v4(140.925,68.275) 141.606,68.956 142.41,68.956 U4.9@142.435,68.981
  Signal #1 w0.254: J6.2 94.299,30.099 102.627,38.427 111.802,38.427 130.825,57.45 133.25,57.45 134.375,58.575 134.375,61 140.123,66.748 140.123,67.31 140.271,67.458 140.271,67.621 v4(140.925,68.275)
SWCLK: J4.5 U4.38 | length 33
  Top Layer w0.254: U4.38 148.897,74.498 148.897,75.237 v1(149.479,75.819)
  Signal #1 w0.254: v1(149.479,75.819) 149.573,75.819 149.646,75.892 155.001,75.892 158.877,72.016 158.877,65.956 158.199,65.278 v3(157.988,65.278)
  Signal #2 w0.254: v3(157.988,65.278) 158.036,65.278 167.259,56.055 J4.5
SWDIO: J4.4 U4.37 | length 28.1
  Top Layer w0.254: U4.37@149.435,74.481 149.435,74.447 149.46,74.422 v1(150.749,74.422)
  Signal #1 w0.254: v1(150.749,74.422) 151.765,75.438 154.813,75.438 157.861,72.39 v3(157.861,67.31)
  Signal #2 w0.254: v3(157.861,67.31) 160.509,64.662 160.523,64.662 161.055,64.13 161.055,64.116 166.116,59.055 J4.4
pads on no net: B1.1 B1.4 B2.3 F1.3 J1.7 J1.8 J4.7 J4.8 J5.7 J5.8 J7.7 J7.8 J8.7 J8.8 J9.7 J9.8 J10.6 J10.7 J10.8 J11.3 J11.4 U1.5 U1.6 U2.4 U3.4 U3.5 U4.2 U4.3 U4.4 U4.5 U4.6 U4.18 U4.39 U4.40 U4.41 U4.42 U4.43 U4.44 U4.46

## Polygon pours and split planes (outlines as drawn)
GND on GND "GND" (solid, pour order 0): 174.45,26.175 70.612,26.175 70.612,26.797 70.612,27.432 70.612,114.41 173.293,114.537 174.45,113.09
no net on GND "GND" (solid, pour order 1): 173.99,112.903 173.863,113.03 173.863,113.221 173.927,113.221 173.99,113.284
GND on Top Layer "GND" (solid, pour order 10): 165.37,114.725 174.45,114.725 174.45,26.15 70.374,26.15 70.374,63.163 70.374,114.725 110.379,114.725
12v on Top Layer "Top Layer-12v" (solid, pour order 3): 108.585,82.677 110.617,83.036 110.617,85.248 108.299,85.814 104.394,88.519 99.949,92.71 88.519,92.71 88.519,83.82 76.708,83.82 76.708,55.753 84.963,47.498 92.456,47.498 92.456,38.735 102.997,38.735 102.997,74.549 106.934,78.486
NetF1_1 on Top Layer "12v Incoming" (solid, pour order 4): 79.756,91.821 85.09,91.821 91.567,96.647 97.028,96.647 97.028,105.55 85.481,105.55 83.62,97.536 79.756,97.536
5v on Top Layer "5v" (solid, pour order 5): 116.84,69.406 123.718,63.182 131.953,63.182 131.953,83.121 121.666,83.121 116.84,83.121
6v on Top Layer "6v" (solid, pour order 9): 105.664,40.64 105.537,40.513 105.537,27.813 167.132,27.813 167.132,37.338 121.158,37.338 117.856,40.64 105.537,40.64
NetF1_1 on Signal #1 "12v_in" (solid, pour order 12): 83.439,97.663 84.645,102.679 85.09,104.902 97.155,104.902 97.155,96.52 91.694,96.52 85.217,91.694 79.629,91.694 79.629,97.663
12v on Signal #1 "12v" (solid, pour order 14): 88.392,83.947 88.265,83.82 76.454,83.82 76.454,55.753 81.534,50.673 92.329,50.673 92.329,41.656 92.456,41.529 96.139,45.212 100.965,45.212 103.124,47.371 103.124,74.676 103.251,74.676 108.204,79.629 108.204,82.677 110.363,82.677 110.871,83.185 110.871,85.217 110.109,85.217 109.22,86.106 106.807,86.106 100.076,92.837 88.392,92.837
5v on Signal #1 "5v" (solid, pour order 15): 116.332,69.469 116.332,83.185 121.158,83.185 131.826,83.185 131.826,69.596 121.666,69.596 121.539,69.469
6v on Signal #1 "6v" (solid, pour order 16): 105.41,36.957 105.537,37.084 114.173,37.084 118.11,41.021 167.132,41.021 167.132,27.813 167.259,27.686 167.132,27.559 105.537,27.559 105.537,36.957 105.41,37.084

## Keep-outs
Keep-Out Layer:
  circle w0.254: c74.077,110.977 r3
  circle w0.254: c73.95,29.575 r3
  circle w0.254: c171.061,111.062 r3
  circle w0.254: c171.025,29.475 r3

## Other copper
Top Layer:
  region net NetC6_1: 112.903,84.582 113.665,84.582 115.697,84.582 115.697,83.185 109.925,75.285 109.242,75.968 112.903,82.193

## Silkscreen, mask and mechanical layers (free items; w line width, h text height)
Top Overlay:
  text "Designed by Bryton King" at 82.325,112.008 h1
  text "BRAKE" at 147.9,111.15 h1
  text "UGV Power Distribution Rev A" at 82,109.475 h1
  text "ACCEL" at 111.8,107.95 h1
  text "12v_IN  GND" at 92.144,104.581 h1
  text "SENSOR STM" at 163.2,100.7 h1
  text "BOOT" at 143.45,97.3 h1
  text "20A" at 96.75,95.05 h1
  text "MAX" at 96.675,92.825 h1
  text "PI4" at 163.55,81.35 h1
  text "12v" at 81.022,79.117 h1
  text "PI_TX" at 158.496,75.184 h1
  text "PUMP" at 77.05,70.45 h1
  text "PI_RX" at 158.496,68.58 h1
  text "SWDIO" at 158.623,66.548 h1
  text "NRST" at 134.675,65.725 h1
  text "5v" at 119.207,65.687 h1
  text "3v3" at 130.6,65 h1
  text "SWCLK" at 159.004,64.516 h1
  text "STM" at 165.6,63 h1
  text "RESET" at 123.017,62.858 h1
  text "GND" at 160.199,56.116 h1
  text "STEERING" at 72.15,33.75 h1
  text "S1&2" at 163.05,30.2 h1
  text "S3&4" at 130.15,30.1 h1
  text "S5&6" at 147.9,30.075 h1
  text "6v" at 134.425,27.9 h1
Mechanical 1:
  the board outline again, w0.254

## Text inside footprints (layer, text, board x,y; h text height)
J2: Mechanical 13 "RefDes2" at 152.883,105.318 h1.27 r180
J6: Mechanical 13 "RefDes2" at 92.316,33.484 h1.27 r180
U2: Top Overlay "*" at 130.594,78.344 h1.27; Mechanical 13 "*" at 130.594,78.344 h1.27